# EAGLE board scrambler_v1_p2 (EAGLE 5.06)
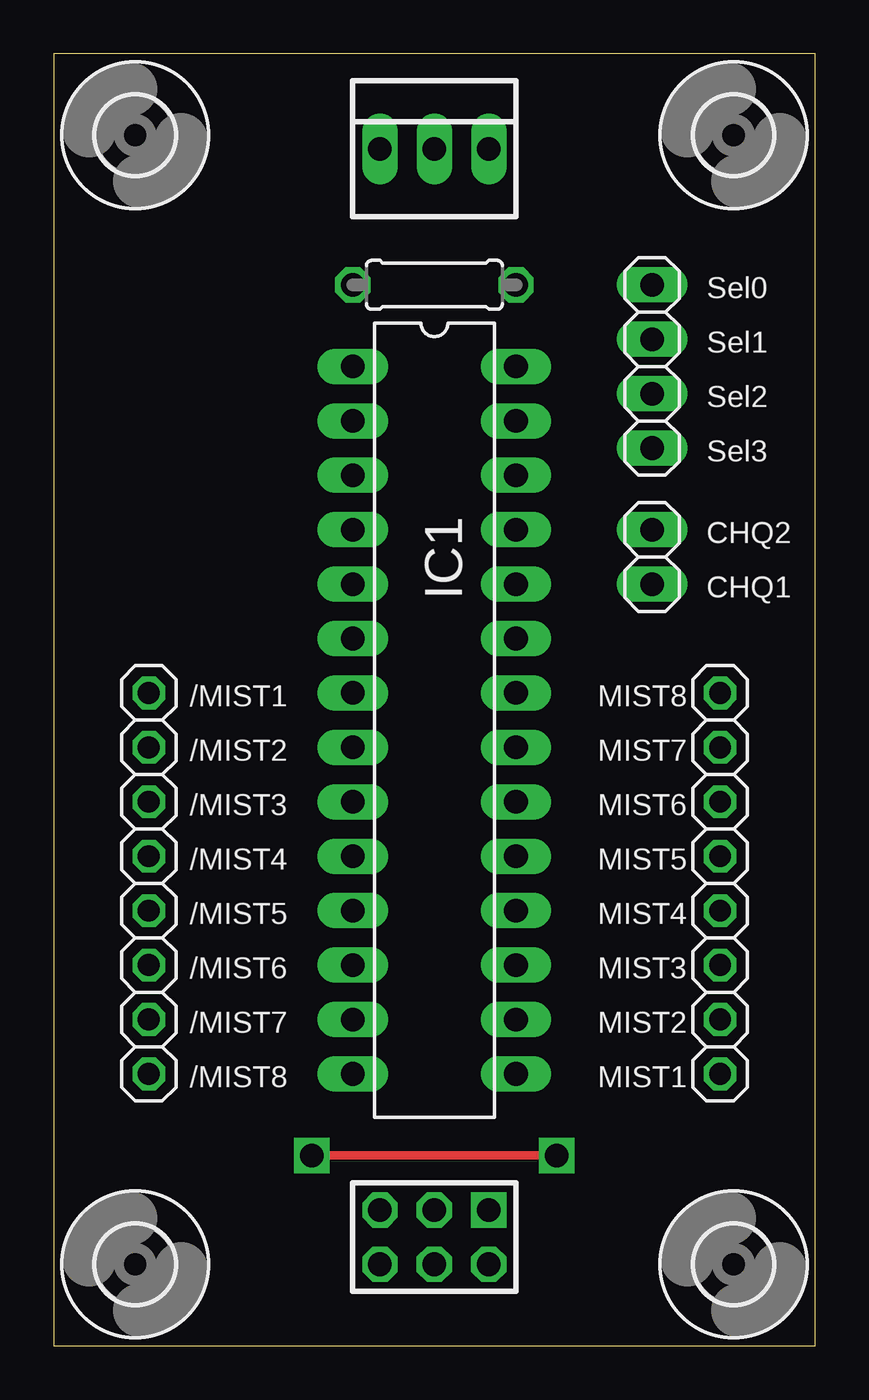
[diagram p0: board, top side]
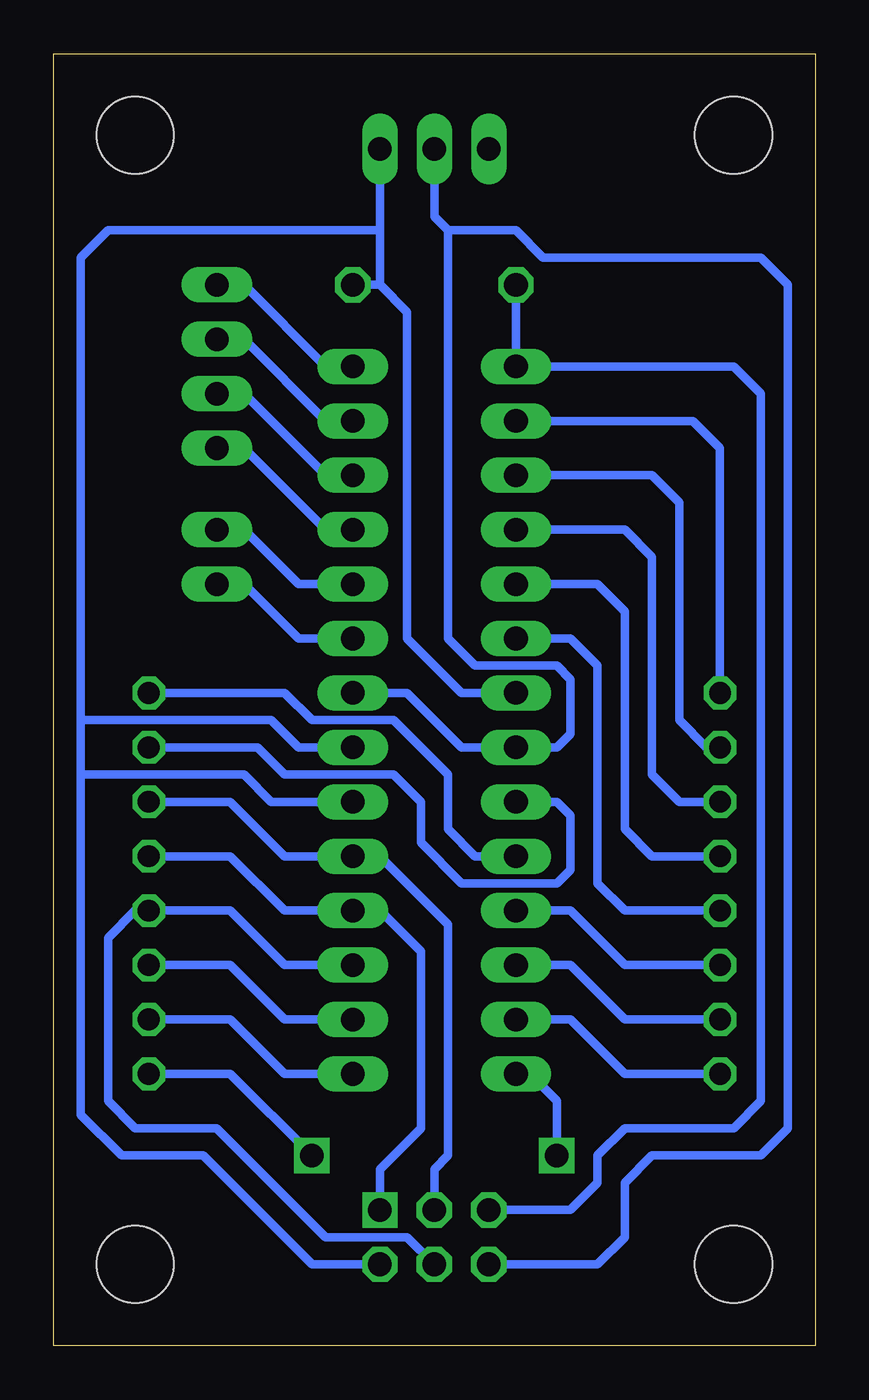
[diagram p1: board, bottom side, seen from below]

Size 35.56 x 60.33 mm. Coordinates in mm from the lower left corner, seen from the top.
Outline: 0,60.33 0,0 35.56,0 35.56,60.33 0,60.33
Copper layers (1*16): Top 0.035mm / dielectric 1.5mm / Bottom 0.035mm
Design rules "default": minimum track width 10mil, minimum drill 24mil, track to track 8mil, track to pad 8mil, pad to pad 8mil, via to via 8mil, smd to smd 8mil, copper to edge 40mil, drill to drill 8mil, minimum pad ring 10mil, minimum via ring 8mil, stop-mask expansion 4mil, vias tented up to drill 0mil, thermal gap 10mil

## Footprints (pad centres in the part's own frame; a part is rotated, then mirrored left to right if it is on the bottom)
DIL28-3 = drill 1.1 long: 1 -16.51,-3.81; 2 -13.97,-3.81; 3 -11.43,-3.81; 4 -8.89,-3.81; 5 -6.35,-3.81; 6 -3.81,-3.81; 7 -1.27,-3.81; 8 1.27,-3.81; 9 3.81,-3.81; 10 6.35,-3.81; 11 8.89,-3.81; 12 11.43,-3.81; 13 13.97,-3.81; 14 16.51,-3.81; 15 16.51,3.81; 16 13.97,3.81; 17 11.43,3.81; 18 8.89,3.81; 19 6.35,3.81; 20 3.81,3.81; 21 1.27,3.81; 22 -1.27,3.81; 23 -3.81,3.81; 24 -6.35,3.81; 25 -8.89,3.81; 26 -11.43,3.81; 27 -13.97,3.81; 28 -16.51,3.81
1X04 = drill 1.1 long: 1 -3.81,0; 2 -1.27,0; 3 1.27,0; 4 3.81,0
AVR-ISP-6 = drill 1.1 square: 1 -2.54,-1.27 | drill 1.1 octagon: 2 -2.54,1.27; 3 0,-1.27; 4 0,1.27; 5 2.54,-1.27; 6 2.54,1.27
1X02 = drill 1.1 long: 1 -1.27,0; 2 1.27,0
1X08 = drill 1.016 octagon: 1 -8.89,0; 2 -6.35,0; 3 -3.81,0; 4 -1.27,0; 5 1.27,0; 6 3.81,0; 7 6.35,0; 8 8.89,0
0207/7 = drill 1.1 octagon: 1 -3.81,0; 2 3.81,0
3,6 = hole 3.6: 0,0
22-23-2031 = drill 1.1 long: 1 -2.54,0; 2 0,0; 3 2.54,0

## Placement (x,y rotation side)
IC1  ATMEGA168  [DIL28-3]  17.78,29.21 270 top
JP1  [1X04]  27.94,45.72 90 top
JP2  AVR-ISP-6  [AVR-ISP-6]  17.78,5.08 180 top
JP3  [1X02]  27.94,36.83 90 top
JP4  [1X08]  31.11,21.59 90 top
JP5  [1X08]  4.45,21.59 270 top
R17  10 K  [0207/7]  17.78,49.53 0 top
U$1  [3,6]  31.75,56.52 270 top
U$2  [3,6]  3.81,56.52 270 top
U$3  [3,6]  3.81,3.81 270 top
U$4  [3,6]  31.75,3.81 270 top
X1  22-23-2031  [22-23-2031]  17.78,55.88 0 top

## Library data of the parts
IC1 JP1 JP3-JP5 R17 U$1-U$4 X1 = caixa
JP2 = ccard

## Nets
+5V: IC1.7 IC1.20 IC1.21 JP2.2 R17.2 X1.3
+12V: X1.1
/MIST1: IC1.2 JP5.1
/MIST2: IC1.3 JP5.2
/MIST3: IC1.4 JP5.3
/MIST4: IC1.5 JP5.4
/MIST5: IC1.6 JP5.5
/MIST6: IC1.11 JP5.6
/MIST7: IC1.12 JP5.7
/MIST8: IC1.13 JP5.8
CHOQUE1: IC1.23 JP3.1
CHOQUE2: IC1.24 JP3.2
CHSEL0: IC1.28 JP1.4
CHSEL1: IC1.27 JP1.3
CHSEL2: IC1.26 JP1.2
CHSEL3: IC1.25 JP1.1
GND: IC1.8 IC1.22 JP2.6 X1.2
MIST1: IC1.14 JP4.1
MIST2: IC1.15 JP4.2
MIST3: IC1.16 JP4.3
MIST4: IC1.17 JP2.4 JP4.4
MIST5: IC1.18 JP2.1 JP4.5
MIST6: IC1.19 JP2.3 JP4.6
MIST7: IC1.9 JP4.7
MIST8: IC1.10 JP4.8
RST: IC1.1 JP2.5 R17.1

## Tracks (layer width: path | path; a pad name or v marks a point on that pad's centre or on a via)
+5V
  Bottom 0.406: IC1.7 16.51,30.48 19.05,33.02 19.05,48.26 20.32,49.53 | 20.32,49.53 R17.2 | X1.3 20.32,52.07 | 20.32,52.07 20.32,49.53 | IC1.20 25.4,25.4 26.67,26.67 34.29,26.67 | IC1.21 24.13,27.94 25.4,29.21 34.29,29.21 | 34.29,29.21 34.29,26.67 | 34.29,26.67 34.29,10.79 32.38,8.89 28.57,8.89 23.5,3.81 JP2.2 | 34.29,29.21 34.29,50.8 33.02,52.07 20.32,52.07
/MIST1
  Bottom 0.406: IC1.2 5.71,43.18 4.45,41.91 JP5.1
/MIST2
  Bottom 0.406: IC1.3 7.62,40.64 6.35,39.37 6.35,29.21 5.08,27.94 JP5.2
/MIST3
  Bottom 0.406: IC1.4 8.89,38.1 7.62,36.83 7.62,26.67 6.35,25.4 JP5.3
/MIST4
  Bottom 0.406: JP5.4 7.62,22.86 8.89,24.13 8.89,34.29 10.16,35.56 IC1.5
/MIST5
  Bottom 0.406: IC1.6 11.43,33.02 10.16,31.75 10.16,21.59 8.89,20.32 JP5.5
/MIST6
  Bottom 0.406: JP5.6 8.89,17.78 11.43,20.32 IC1.11
/MIST7
  Bottom 0.406: JP5.7 8.89,15.24 11.43,17.78 IC1.12
/MIST8
  Bottom 0.406: JP5.8 8.89,12.7 11.43,15.24 IC1.13
CHOQUE1
  Bottom 0.406: IC1.23 24.13,33.02 26.67,35.56 JP3.1
CHOQUE2
  Bottom 0.406: JP3.2 26.67,38.1 24.13,35.56 IC1.24
CHSEL0
  Bottom 0.406: JP1.4 26.67,49.53 22.86,45.72 IC1.28
CHSEL1
  Bottom 0.406: JP1.3 26.67,46.99 22.86,43.18 IC1.27
CHSEL2
  Bottom 0.406: JP1.2 26.67,44.45 22.86,40.64 IC1.26
CHSEL3
  Bottom 0.406: IC1.25 22.86,38.1 26.67,41.91 JP1.1
GND
  Bottom 0.406: 17.14,52.07 13.97,52.07 12.7,50.8 2.54,50.8 1.27,49.53 1.27,10.16 2.54,8.89 7.62,8.89 8.89,7.62 8.89,5.08 10.16,3.81 JP2.6 | X1.2 17.78,52.7 17.14,52.07 | 17.14,52.07 17.14,33.02 15.88,31.75 12.06,31.75 11.43,31.11 11.43,28.57 12.06,27.94 IC1.8 16.51,27.94 19.05,30.48 IC1.22
MIST1  (via drill 1.1)
  Top 0.406: v12.06,8.89 v23.5,8.89
  Bottom 0.406: JP4.1 27.3,12.7 v23.5,8.89 | IC1.14 13.34,12.7 12.06,11.43 v12.06,8.89
MIST2
  Bottom 0.406: JP4.2 27.3,15.24 24.77,12.7 IC1.15
MIST3
  Bottom 0.406: JP4.3 27.3,17.78 24.77,15.24 IC1.16
MIST4
  Bottom 0.406: IC1.17 24.77,17.78 27.3,20.32 JP4.4 31.75,20.32 33.02,19.05 33.02,11.43 31.75,10.16 27.94,10.16 22.86,5.08 19.05,5.08 JP2.4
MIST5
  Bottom 0.406: JP4.5 27.3,22.86 24.77,20.32 IC1.18 20.32,20.32 18.41,18.41 18.41,10.16 20.32,8.26 JP2.1
MIST6
  Bottom 0.406: JP4.6 27.3,25.4 24.77,22.86 IC1.19 20.32,22.86 17.14,19.68 17.14,8.89 17.78,8.26 JP2.3
MIST7
  Bottom 0.406: JP4.7 26.04,27.94 24.77,26.67 19.68,26.67 18.41,25.4 18.41,23.5 16.51,21.59 12.06,21.59 11.43,22.23 11.43,24.77 12.06,25.4 IC1.9
MIST8
  Bottom 0.406: JP4.8 24.77,30.48 23.5,29.21 19.68,29.21 17.14,26.67 17.14,24.13 15.88,22.86 IC1.10
RST
  Bottom 0.406: R17.1 IC1.1 3.81,45.72 2.54,44.45 2.54,11.43 3.81,10.16 8.89,10.16 10.16,8.89 10.16,7.62 11.43,6.35 JP2.5

## Text on the board
tNames: Sel0 | Sel1 | Sel2 | Sel3 | CHQ2 | CHQ1 | /MIST1 | MIST8 | /MIST2 | MIST7 | /MIST3 | MIST6 | /MIST4 | MIST5 | /MIST5 | MIST4 | /MIST6 | MIST3 | /MIST7 | MIST2 | /MIST8 | MIST1